# EAGLE board NSL_TI_Robotics_Dev_Board (EAGLE 5.10)
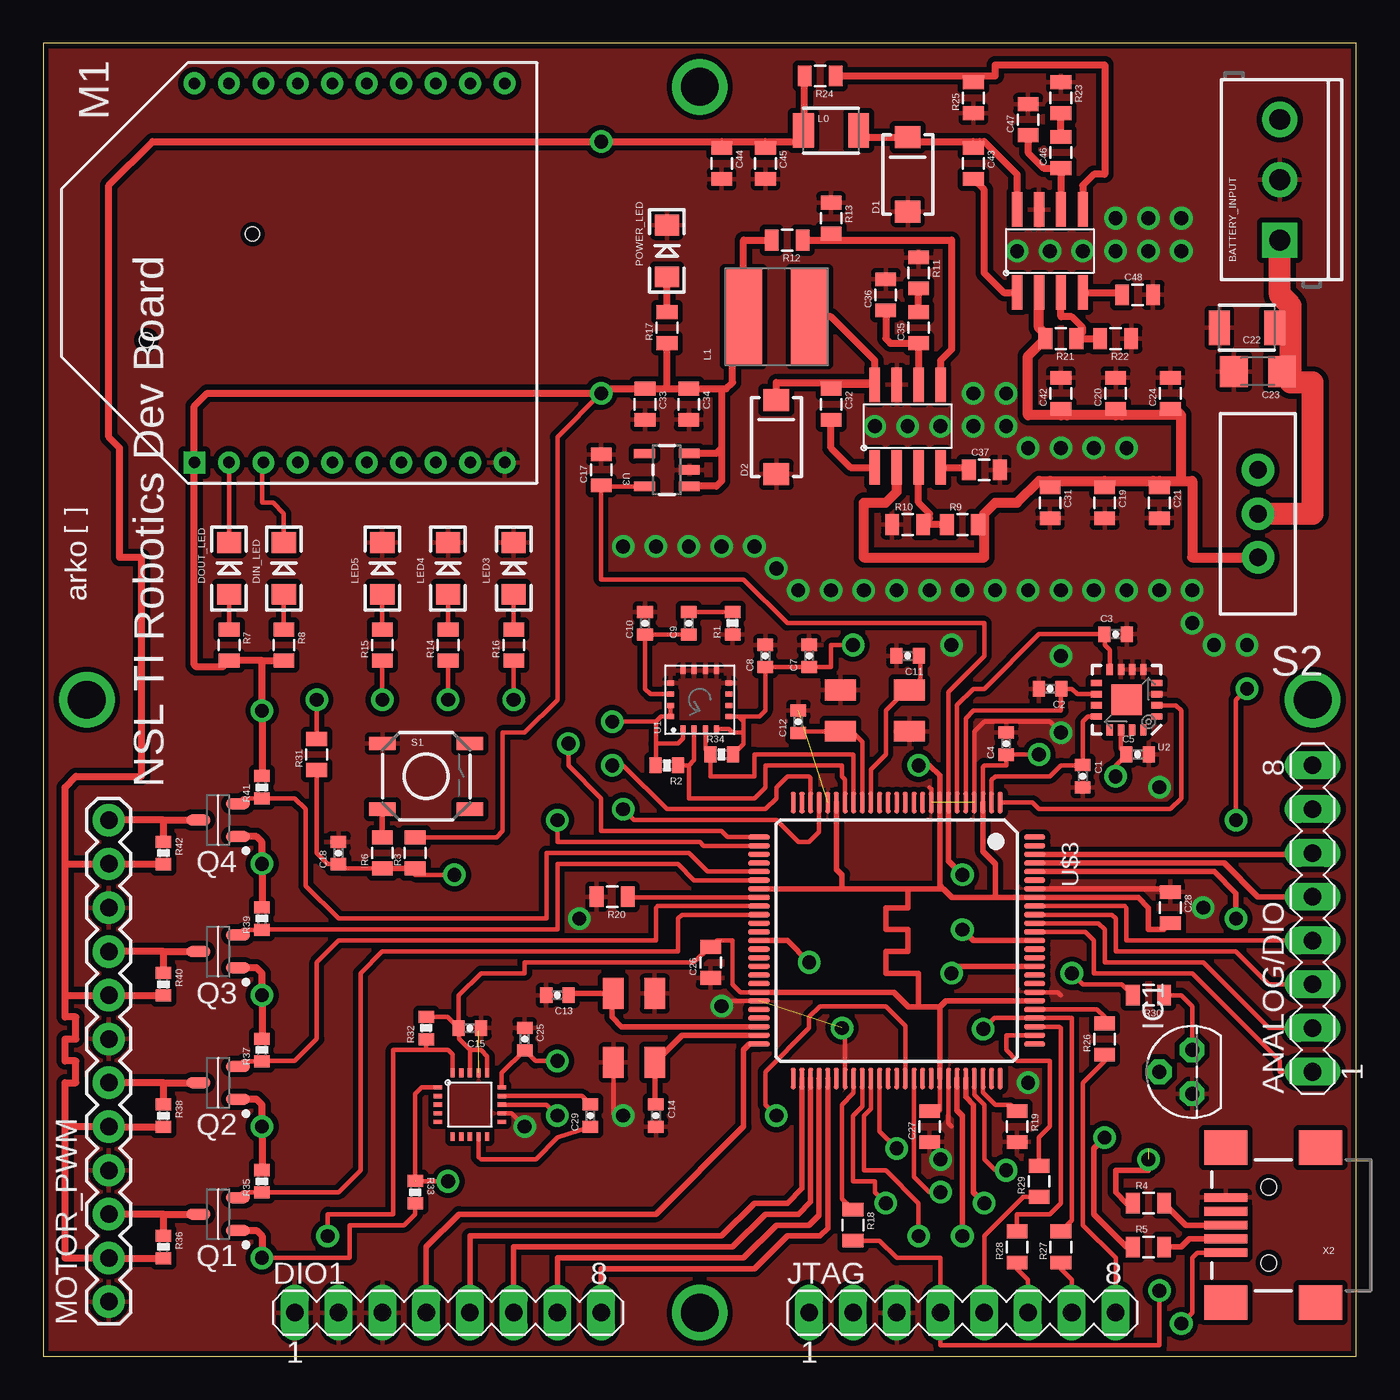
[diagram p0: board, top side]
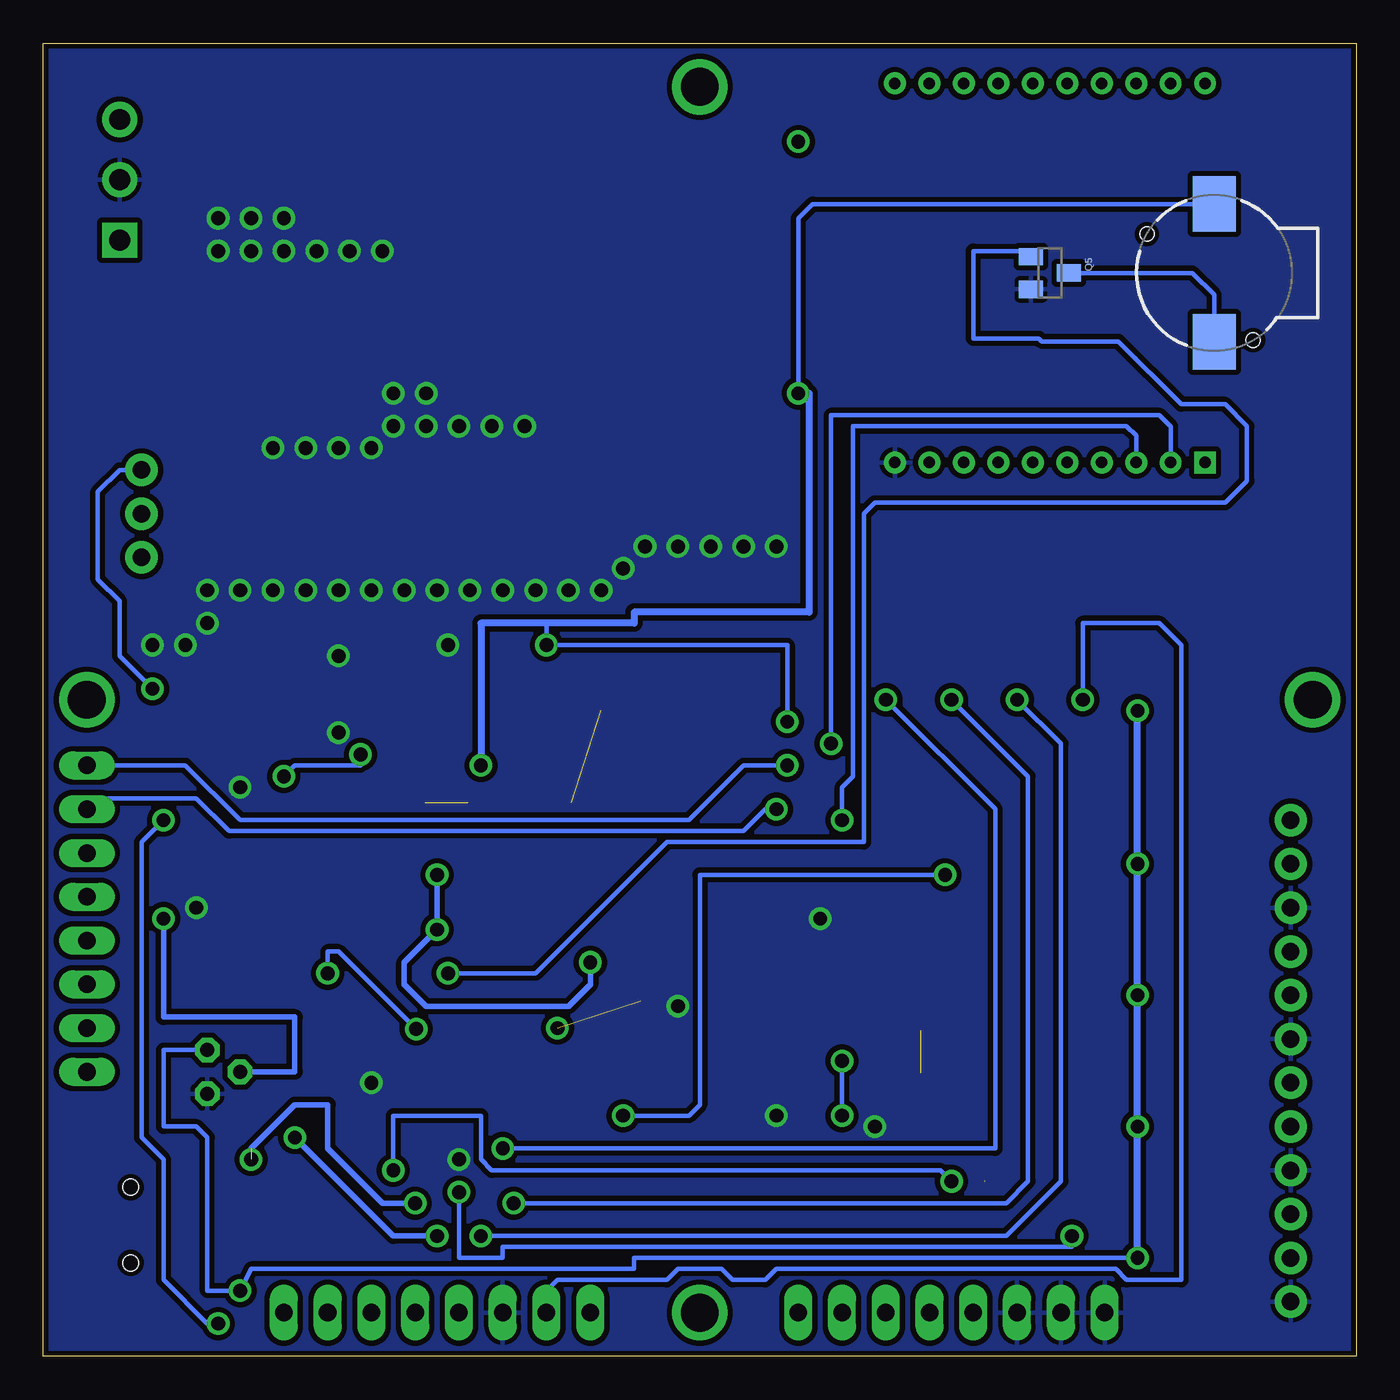
[diagram p1: board, bottom side, seen from below]

Size 76.2 x 76.2 mm. Coordinates in mm from the lower left corner, seen from the top.
Outline: 0,0 76.2,0 76.2,76.2 0,76.2 0,0
Copper layers (1*16): Top 0.0356mm / dielectric 1.5011mm / Bottom 0.0356mm
Design rules "SparkFun-mod": minimum track width 8mil, minimum drill 20mil, track to track 12mil, track to pad 12mil, pad to pad 8mil, via to via 8mil, smd to smd 8mil, copper to edge 12mil, drill to drill 8mil, minimum pad ring 12mil, minimum via ring 10mil, stop-mask expansion 4mil, vias tented up to drill 25mil, thermal gap 10mil
Milling: 4 lines

## Footprints (pad centres in the part's own frame; a part is rotated, then mirrored left to right if it is on the bottom)
ABM3G = smd 1.8 x 1.2: P$1 2,1.2; P$2 -2,1.2; P$3 -2,-1.2; P$4 2,-1.2
MA08-1 = drill 1.016 long: 1 -8.89,0; 2 -6.35,0; 3 -3.81,0; 4 -1.27,0; 5 1.27,0; 6 3.81,0; 7 6.35,0; 8 8.89,0
SCREWTERMINAL-3.5MM-3 = drill 1.2 pad 2.032 square: 1 0,0 | drill 1.2 pad 2.032 round: 2 3.5,0; 3 7,0
0402-CAP = smd 0.7 x 0.9: 1 -0.65,0; 2 0.65,0
0805 = smd 0.8 x 1.2: 1 -0.9,0; 2 0.9,0
1210 = smd 1.2 x 2: 1 -1.6,0; 2 1.6,0
1206 = smd 1.6 x 1.8: 1 -1.4,0; 2 1.4,0
SMA-DIODE = smd 1.27 x 1.47: A -2.15,0; C 2.15,0
LED-1206 = smd 1.2 x 1.4: A -1.5,0; C 1.5,0
TO92 = drill 0.813 octagon: 1 -1.27,0; 2 0,1.905; 3 1.27,0
CR54 = smd 5.5 x 2.15: P$1 0,1.92; P$2 0,-1.92
XBEE = drill 0.66 square: 1 -11,9 | drill 0.66 round: 2 -11,7; 3 -11,5; 4 -11,3; 5 -11,1; 6 -11,-1; 7 -11,-3; 8 -11,-5; 9 -11,-7; 10 -11,-9; 11 11,-9; 12 11,-7; 13 11,-5; 14 11,-3; 15 11,-1; 16 11,1; 17 11,3; 18 11,5; 19 11,7; 20 11,9
1X12 = drill 1.016 pad 1.88 round: 1 0,0; 2 2.54,0; 3 5.08,0; 4 7.62,0; 5 10.16,0; 6 12.7,0; 7 15.24,0; 8 17.78,0; 9 20.32,0; 10 22.86,0; 11 25.4,0; 12 27.94,0
SOT95P280X135-3N = smd 1.4 x 0.65: 1 -1.15,0.95; 2 -1.15,-0.95; 3 1.15,0
SOT23 = smd 1 x 1.4: 1 -0.95,-1.1; 2 0.95,-1.1; 3 0,1.1
0402-RES = smd 0.7 x 0.9: 1 -0.65,0; 2 0.65,0
TACTILE_SWITCH_SMD = smd 1.524 x 0.762: 1 -2.54,1.905; 2 2.54,1.905; 3 -2.54,-1.905; 4 2.54,-1.905
SWITCH-SPDT = drill 1.016 pad 1.88 round: 1 0,2.54; 2 0,0; 3 0,-2.54
BUZZER-CCV = smd 3.2 x 2.5: + 4,0; - -4,0 | hole 0.8: -3.9,-2.25; 2.25,3.9
LGA-16L = smd 0.4 x 0.3: 1 -1.7,0.975; 2 -1.7,0.325; 3 -1.7,-0.325; 4 -1.7,-0.975; 9 1.7,-0.975; 10 1.7,-0.325; 11 1.7,0.325; 12 1.7,0.975 | smd 0.3 x 0.4: 5 -0.975,-1.7; 6 -0.325,-1.7; 7 0.325,-1.7; 8 0.975,-1.7; 13 0.975,1.7; 14 0.325,1.7; 15 -0.325,1.7; 16 -0.975,1.7
LFCSP-16 = smd 1.75 x 1.75: 0 0,0 | smd 0.65 x 0.37: 1 -1.75,0.975; 2 -1.75,0.325; 3 -1.75,-0.325; 4 -1.75,-0.975; 9 1.75,-0.975; 10 1.75,-0.325; 11 1.75,0.325; 12 1.75,0.975 | smd 0.37 x 0.65: 5 -0.975,-1.75; 6 -0.325,-1.75; 7 0.325,-1.75; 8 0.975,-1.75; 13 0.975,1.75; 14 0.325,1.75; 15 -0.325,1.75; 16 -0.975,1.75
SOT23-5 = smd 0.55 x 1.2: 1 -0.95,-1.3; 2 0,-1.3; 3 0.95,-1.3; 4 0.95,1.3; 5 -0.95,1.3
TPS54231 = smd 0.6 x 2: P$1 -1.905,-2.4; P$2 -0.635,-2.4; P$3 0.635,-2.4; P$4 1.905,-2.4; P$5 1.905,2.4; P$6 0.635,2.4; P$7 -0.635,2.4; P$8 -1.905,2.4
LQFP100 = smd 0.3 x 1.25: 1 -6,-8; 2 -5.5,-8; 3 -5,-8; 4 -4.5,-8; 5 -4,-8; 6 -3.5,-8; 7 -3,-8; 8 -2.5,-8; 9 -2,-8; 10 -1.5,-8; 11 -1,-8; 12 -0.5,-8; 13 0,-8; 14 0.5,-8; 15 1,-8; 16 1.5,-8; 17 2,-8; 18 2.5,-8; 19 3,-8; 20 3.5,-8; 21 4,-8; 22 4.5,-8; 23 5,-8; 24 5.5,-8; 25 6,-8; 51 6,8; 52 5.5,8; 53 5,8; 54 4.5,8; 55 4,8; 56 3.5,8; 57 3,8; 58 2.5,8; 59 2,8; 60 1.5,8; 61 1,8; 62 0.5,8; 63 0,8; 64 -0.5,8; 65 -1,8; 66 -1.5,8; 67 -2,8; 68 -2.5,8; 69 -3,8; 70 -3.5,8; 71 -4,8; 72 -4.5,8; 73 -5,8; 74 -5.5,8; 75 -6,8 | smd 1.25 x 0.3: 26 8,-6; 27 8,-5.5; 28 8,-5; 29 8,-4.5; 30 8,-4; 31 8,-3.5; 32 8,-3; 33 8,-2.5; 34 8,-2; 35 8,-1.5; 36 8,-1; 37 8,-0.5; 38 8,0; 39 8,0.5; 40 8,1; 41 8,1.5; 42 8,2; 43 8,2.5; 44 8,3; 45 8,3.5; 46 8,4; 47 8,4.5; 48 8,5; 49 8,5.5; 50 8,6; 76 -8,6; 77 -8,5.5; 78 -8,5; 79 -8,4.5; 80 -8,4; 81 -8,3.5; 82 -8,3; 83 -8,2.5; 84 -8,2; 85 -8,1.5; 86 -8,1; 87 -8,0.5; 88 -8,0; 89 -8,-0.5; 90 -8,-1; 91 -8,-1.5; 92 -8,-2; 93 -8,-2.5; 94 -8,-3; 95 -8,-3.5; 96 -8,-4; 97 -8,-4.5; 98 -8,-5; 99 -8,-5.5; 100 -8,-6
HMC5843 = smd 0.5 x 0.25: P$1 -1.85,1; P$2 -1.85,0.5; P$3 -1.85,0; P$4 -1.85,-0.5; P$5 -1.85,-1; P$11 1.85,-1; P$12 1.85,-0.5; P$13 1.85,0; P$14 1.85,0.5; P$15 1.85,1 | smd 0.25 x 0.5: P$6 -1,-1.85; P$7 -0.5,-1.85; P$8 0,-1.85; P$9 0.5,-1.85; P$10 1,-1.85; P$16 1,1.85; P$17 0.5,1.85; P$18 0,1.85; P$19 -0.5,1.85; P$20 -1,1.85
USB-MINIB = smd 2.5 x 0.5: D+ 2.5,0; D- 2.5,0.8; GND 2.5,-1.6; ID 2.5,-0.8; VBUS 2.5,1.6 | smd 2.5 x 2: GND@1 -3,-4.5; GND@2 -3,4.5; GND@3 2.5,4.5; GND@4 2.5,-4.5 | hole 0.9: 0,2.2; 0,-2.2

## Placement (x,y rotation side)
16MHZ  16MHz  [ABM3G]  34.29,19.05 90 top
25MHZ  25MHz  [ABM3G]  48.26,37.47 0 top
ANALOG/DIO  [MA08-1]  73.66,25.4 90 top
BATTERY_INPUT  [SCREWTERMINAL-3.5MM-3]  71.75,64.77 90 top
C1  0.01uF  [0402-CAP]  60.33,33.66 270 top
C2  0.01uF  [0402-CAP]  58.42,38.73 180 top
C3  0.01uF  [0402-CAP]  62.23,41.91 0 top
C4  0.1uF  [0402-CAP]  55.88,35.56 90 top
C5  1uF  [0402-CAP]  63.5,34.92 0 top
C7  100nF  [0402-CAP]  44.45,40.64 90 top
C8  10uF  [0402-CAP]  41.91,40.64 90 top
C9  470nF  [0402-CAP]  37.47,42.55 90 top
C10  10nF  [0402-CAP]  34.92,42.55 90 top
C11  10pF  [0402-CAP]  50.16,40.64 180 top
C12  10pF  [0402-CAP]  43.81,36.83 90 top
C13  10pF  [0402-CAP]  29.84,20.95 180 top
C14  10pF  [0402-CAP]  35.56,13.97 270 top
C15  0.1uF  [0402-CAP]  24.77,19.05 180 top
C17  1uF  [0805]  32.38,51.44 90 top
C18  0.1uF  [0402-CAP]  17.14,29.21 90 top
C19  4.7uF  [0805]  61.59,49.53 270 top
C20  4.7uF  [0805]  62.23,55.88 90 top
C21  4.7uF  [0805]  64.77,49.53 270 top
C22  10uF  [1210]  69.85,59.69 180 top
C23  1uF  [1206]  70.48,57.15 180 top
C24  4.7uF  [0805]  65.41,55.88 90 top
C25  4.7uF  [0402-CAP]  27.94,18.41 270 top
C26  0.1uF  [0805]  38.73,22.86 90 top
C27  0.1uF  [0805]  51.44,13.34 90 top
C28  0.1uF  [0805]  65.41,26.04 270 top
C29  0.22uF  [0402-CAP]  31.75,13.97 90 top
C31  0.01uF  [0805]  58.42,49.53 270 top
C32  0.1uF  [0805]  45.72,55.24 270 top
C33  47uF  [0805]  34.92,55.24 270 top
C34  47uF  [0805]  37.47,55.24 270 top
C35  1000pF  [0805]  50.8,59.69 90 top
C36  47pF  [0805]  48.9,61.59 90 top
C37  0.015uF  [0805]  54.61,51.44 0 top
C42  0.01uF  [0805]  59.05,55.88 90 top
C43  0.1uF  [0805]  53.98,69.22 270 top
C44  33uF  [0805]  39.37,69.22 270 top
C45  33uF  [0805]  41.91,69.22 270 top
C46  1800pF  [0805]  59.05,69.85 90 top
C47  47pF  [0805]  57.15,71.75 90 top
C48  0.015uF  [0805]  63.5,61.59 0 top
D1  [SMA-DIODE]  50.16,68.58 90 top
D2  [SMA-DIODE]  42.55,53.34 90 top
DIN_LED  [LED-1206]  13.97,45.72 90 top
DIO1  [MA08-1]  23.5,2.54 0 top
DOUT_LED  [LED-1206]  10.79,45.72 90 top
IC1  AD590ZR  [TO92]  66.67,16.51 90 top
JTAG  [MA08-1]  53.34,2.54 0 top
L0  15uH  [1210]  45.72,71.12 0 top
L1  10uH  [CR54]  42.55,60.33 90 top
LED3  [LED-1206]  27.3,45.72 90 top
LED4  [LED-1206]  23.5,45.72 90 top
LED5  [LED-1206]  19.68,45.72 90 top
M1  XBEE  [XBEE]  17.78,62.87 90 top
MOTOR_PWM  [1X12]  3.81,3.17 90 top
POWER_LED  [LED-1206]  36.2,64.14 90 top
Q1  NCH  [SOT95P280X135-3N]  10.16,8.26 180 top
Q2  NCH  [SOT95P280X135-3N]  10.16,15.88 180 top
Q3  NCH  [SOT95P280X135-3N]  10.16,23.5 180 top
Q4  NCH  [SOT95P280X135-3N]  10.16,31.11 180 top
Q5  [SOT23]  17.78,62.87 270 bottom
R1  10K  [0402-RES]  40.01,42.55 90 top
R2  10K  [0402-RES]  36.2,34.29 180 top
R3  10k  [0805]  21.59,29.21 90 top
R4  33  [0805]  64.14,8.89 0 top
R5  33  [0805]  64.14,6.35 0 top
R6  100  [0805]  19.68,29.21 90 top
R7  1K  [0805]  10.79,41.27 270 top
R8  1K  [0805]  13.97,41.27 270 top
R9  DNP  [0805]  53.34,48.26 0 top
R10  DNP  [0805]  50.16,48.26 0 top
R11  29.4K  [0805]  50.8,62.87 270 top
R12  10.2K  [0805]  43.18,64.77 180 top
R13  3.24K  [0805]  45.72,66.04 270 top
R14  1k  [0805]  23.5,41.27 90 top
R15  1k  [0805]  19.68,41.27 90 top
R16  1k  [0805]  27.3,41.27 90 top
R17  1K  [0805]  36.2,59.69 90 top
R18  10K  [0805]  46.99,7.62 270 top
R19  9.10K  [0805]  56.52,13.34 270 top
R20  12.4K  [0805]  33.02,26.67 180 top
R21  DNP  [0805]  59.05,59.05 180 top
R22  DNP  [0805]  62.23,59.05 180 top
R23  21K  [0805]  59.05,73.03 270 top
R24  10K  [0805]  45.09,74.3 180 top
R25  1.91K  [0805]  53.98,73.03 90 top
R26  27  [0805]  61.59,18.41 90 top
R27  27  [0805]  59.05,6.35 90 top
R28  27  [0805]  56.52,6.35 90 top
R29  27  [0805]  57.78,10.16 90 top
R30  10K  [0805]  64.14,20.95 180 top
R31  27  [0805]  15.88,34.92 90 top
R32  10K  [0402-RES]  22.23,19.05 90 top
R33  10K  [0402-RES]  21.59,9.53 270.1 top
R34  10K  [0402-RES]  39.37,34.92 0 top
R35  10K  [0402-RES]  12.7,10.16 90 top
R36  10K  [0402-RES]  6.99,6.35 270 top
R37  10K  [0402-RES]  12.7,17.78 90 top
R38  10K  [0402-RES]  6.99,13.97 270 top
R39  10K  [0402-RES]  12.7,25.4 90 top
R40  10K  [0402-RES]  6.99,21.59 270 top
R41  10K  [0402-RES]  12.7,33.02 90 top
R42  10K  [0402-RES]  6.99,29.21 270 top
S1  SWITCH-MOMENTARY-2SMD  [TACTILE_SWITCH_SMD]  22.23,33.66 0 top
S2  [SWITCH-SPDT]  70.48,48.9 180 top
SG1  BUZZERSMD2  [BUZZER-CCV]  8.26,62.87 90 bottom
U1  L3G4200DH  [LGA-16L]  38.1,38.1 90 top
U2  ADXL335  [LFCSP-16]  62.87,38.1 180 top
U3  SN105125  [SOT23-5]  36.2,51.44 90.1 top
U$1  [ARKO_LOGO]  2.54,43.81 90 top
U$2  TPS54231_3V3  [TPS54231]  50.16,53.98 0 top
U$3  LM3S9B96LM3S9B96  [LQFP100]  49.53,24.13 180 top
U$4  HMC5843  [HMC5843]  24.77,14.61 0 top
U$5  TPS54231_5V  [TPS54231]  58.42,64.14 0 top
X2  USBSMD  [USB-MINIB]  71.12,7.62 180 top

## Library data of the parts
16MHZ 25MHZ = ABM3G
ANALOG/DIO DIO1 JTAG = con-lstb
BATTERY_INPUT C1-C5 C7-C15 C17-C29 C31-C37 C42-C48 D1 D2 DIN_LED DOUT_LED L0 L1 LED3-LED5 MOTOR_PWM POWER_LED Q5 R1-R42 S1 S2 SG1 U2 U3 X2 = SparkFun
IC1 = linear
M1 = xbee_r1
Q1-Q4 = ipc-7351-transistor
U1 = st-microelectronics-l3g4200dh
U$1 = arko_logo
U$2 U$5 = TPS54231
U$3 = luminary-arm
U$4 = HMC5843

## Nets
5V: C44.1 C45.1 L0.1 MOTOR_PWM.2 MOTOR_PWM.5 MOTOR_PWM.8 MOTOR_PWM.11 R24.2 R36.2 R38.2 R40.2 R42.2
ENABLE: R9.1 R10.2 U$2.P$3
ENABLE1: R21.1 R22.2 U$5.P$3
GND: 16MHZ.P$2 16MHZ.P$4 25MHZ.P$2 25MHZ.P$4 BATTERY_INPUT.2 C1.2 C2.2 C3.2 C4.2 C5.2 C7.2 C8.2 C10.2 C11.2 C12.2 C13.2 C14.2 C15.1 C17.2 C18.2 C19.2 C20.2 C21.2 C22.2 C23.2 C24.2 C25.1 C26.1 C27.1 C28.1 C31.2 C33.2 C34.2 C36.2 C37.2 C42.2 C44.2 C45.2 C47.2 C48.2 D1.A D2.A DIO1.1 DIO1.2 DIO1.3 IC1.1 JTAG.3 LED3.C LED4.C LED5.C M1.10 MOTOR_PWM.1 MOTOR_PWM.4 MOTOR_PWM.7 MOTOR_PWM.10 POWER_LED.C Q5.2 R1.1 R10.1 R11.1 R13.1 R19.2 R20.2 R22.1 R23.1 R25.1 S1.1 U1.8 U1.9 U1.10 U1.11 U1.12 U1.13 U2.3 U2.5 U2.6 U2.7 U3.2 U$2.P$7 U$3.4 U$3.9 U$3.21 U$3.45 U$3.57 U$3.69 U$3.82 U$3.94 U$4.P$12 U$4.P$17 U$5.P$7 X2.GND
MOTOR1: MOTOR_PWM.3 Q1.3 R36.1
MOTOR1_LV: Q1.2 R35.1 U$3.35
MOTOR2: MOTOR_PWM.6 Q2.3 R38.1
MOTOR2_LV: Q2.2 R37.1 U$3.34
MOTOR3: MOTOR_PWM.9 Q3.3 R40.1
MOTOR3_LV: Q3.2 R39.1 U$3.31
MOTOR4: MOTOR_PWM.12 Q4.3 R42.1
MOTOR4_LV: Q4.2 R41.1 U$3.30
N$1: C1.1 U2.12 U$3.2
N$2: C2.1 U2.10 U$3.5
N$3: C3.1 U2.8 U$3.6
N$4: U2.2 U$3.1
N$5: LED3.A R16.2
N$6: R4.1 U$3.71
N$7: R4.2 X2.D+
N$8: C17.1 U3.5 U$3.7 U$3.38 U$3.88
N$9: R6.2 S1.3
N$10: R5.2 X2.D-
N$12: JTAG.8 R26.1
N$13: R26.2 U$3.80
N$14: R27.2 R30.2 U$3.79
N$15: R5.1 U$3.70
N$16: DIN_LED.C M1.3 U$3.27
N$17: DOUT_LED.C M1.2 U$3.26
N$18: C9.1 C10.1 U1.14
N$19: C9.2 R1.2
N$20: JTAG.7 R27.1
N$21: R2.1 U1.2 U$3.19
N$22: R34.1 U1.3 U$3.18
N$23: JTAG.6 R28.1
N$24: R28.2 U$3.78
N$25: R29.2 U$3.77
N$26: JTAG.5 R29.1
N$27: LED5.A R15.2
N$28: LED4.A R14.2
N$29: DIN_LED.A R8.1
N$30: DOUT_LED.A R7.1
N$31: ANALOG/DIO.7 U$3.22
N$32: R19.1 U$3.73
N$33: 25MHZ.P$1 C11.1 U$3.16
N$34: R18.1 U$3.58
N$35: R20.1 U$3.33
N$36: Q5.1 U$3.85
N$37: C25.2 U$4.P$13 U$4.P$15
N$38: C29.1 U$4.P$9
N$39: C29.2 U$4.P$14
N$40: 25MHZ.P$3 C12.1 U$3.17
N$41: R33.1 U$3.72 U$4.P$1
N$42: R32.1 U$3.65 U$4.P$20
N$43: ANALOG/DIO.8 U$3.23
N$44: JTAG.2 R31.2
N$47: 16MHZ.P$1 C13.1 U$3.48
N$48: 16MHZ.P$3 C14.1 U$3.49
N$49: DIO1.8 U$3.55
N$50: DIO1.7 U$3.54
N$51: DIO1.6 U$3.53
N$52: DIO1.5 U$3.52
N$53: DIO1.4 U$3.50
N$56: ANALOG/DIO.6 U$3.98
N$57: ANALOG/DIO.5 U$3.97
N$58: ANALOG/DIO.1 U$3.89
N$59: ANALOG/DIO.2 U$3.90
N$60: Q5.3 SG1.-
N$61: R14.1 U$3.59
N$62: C43.2 U$5.P$1
N$63: R15.1 U$3.60
N$64: ANALOG/DIO.3 U$3.91
N$65: C32.2 U$2.P$1
N$66: R16.1 U$3.61
N$67: C32.1 D2.C L1.P$2 U$2.P$8
N$68: POWER_LED.A R17.2
N$69: ANALOG/DIO.4 U$3.92
N$71: IC1.2 U$3.96
N$72: C18.1 R3.1 R6.1 R31.1 U$3.64
N$74: C35.1 C36.1 U$2.P$6
N$75: C37.1 U$2.P$4
N$76: C35.2 R11.2
N$77: C43.1 D1.C L0.2 U$5.P$8
N$78: R12.1 R13.2 U$2.P$5
N$79: C48.1 U$5.P$4
N$80: C46.1 C47.1 U$5.P$6
N$81: C46.2 R23.2
N$82: R24.1 R25.2 U$5.P$5
N$85: BATTERY_INPUT.1 C22.1 C23.1 S2.2
USB_VIN: S2.3 X2.VBUS
VCC: C4.1 C5.1 C7.1 C8.1 C15.2 C26.2 C27.2 C28.2 C33.1 C34.1 IC1.3 JTAG.4 L1.P$1 M1.1 Q1.1 Q2.1 Q3.1 Q4.1 R2.2 R3.2 R7.2 R8.2 R12.2 R17.1 R18.2 R30.1 R32.2 R33.2 R34.2 R35.2 R37.2 R39.2 R41.2 SG1.+ U1.1 U1.4 U1.5 U1.15 U1.16 U2.14 U3.1 U3.3 U$3.3 U$3.8 U$3.20 U$3.32 U$3.44 U$3.68 U$3.81 U$3.93 U$4.P$16 U$4.P$18
VDD: U$3.56
VIN: C19.1 C20.1 C21.1 C24.1 C31.1 C42.1 R9.2 R21.2 S2.1 U$2.P$2 U$5.P$2

## Tracks (layer width: path | path; a pad name or v marks a point on that pad's centre or on a via)
5V  (via drill 0.8)
  Top 0.406: R24.2 44.19,71.19 L0.1 44.12,70.79 43.81,70.48 41.91,70.48 | 39.37,70.48 41.91,70.48 | 39.37,70.48 v32.38,70.48 6.35,70.48 3.81,67.94 3.81,53.34 4.45,52.7 4.45,46.35 5.71,46.35 5.71,33.66 1.91,33.66 1.27,33.02 1.27,28.57 | 39.37,70.48 C44.1 | 41.91,70.48 C45.1 | 1.27,28.57 MOTOR_PWM.11 6.97,28.57 R42.2 | 1.27,20.95 1.27,28.57 | 1.27,20.95 MOTOR_PWM.8 3.83,20.94 R40.2 | 1.27,20.95 1.27,19.68 1.91,19.68 1.91,18.41 1.27,18.41 1.27,17.14 1.91,17.14 1.91,15.88 1.27,15.88 1.27,13.34 | 1.27,13.34 MOTOR_PWM.5 3.83,13.32 R38.2 | 1.27,13.34 1.27,5.71 MOTOR_PWM.2 3.83,5.7 R36.2
ENABLE
  Top 0.406: R9.1 R10.2 51.44,48.63 51.44,48.9 50.8,49.53 U$2.P$3
ENABLE1
  Top 0.406: U$5.P$3 59.05,60.33 59.69,60.33 60.33,59.69 60.33,59.42 R21.1 R22.2
GND  (via drill 0.8)  (4 unrouted)
  Top 0.254: 25.27,18.91 C15.1 | 27.93,19.05 C25.1 | 16MHZ.P$2 33.09,14.04 v33.66,13.97 | v59.05,36.2 58.42,36.83 54.61,36.83 54.03,36.25 U$3.4 | U$4.P$12 27.17,14.11 v27.94,13.34 | U$3.45 39.68,20.63 v39.37,20.32 | U$3.82 58.88,21.13 59.05,20.95 | U$3.9 51.53,32.92 51.44,33.02 | U$3.69 52.53,13.51 52.7,13.34 | U$3.57 46.53,18.88 46.35,19.05
  Top 0.305: U$3.94 65.21,27.13 C28.1
  other vias: 62.23,66.04 64.14,66.04 66.04,66.04 66.04,64.14 64.14,64.14 62.23,64.14 60.33,64.14 58.42,64.14 56.52,64.14 57.15,52.7 59.05,52.7 60.96,52.7 62.87,52.7 55.88,53.98 55.88,55.88 53.98,55.88 53.98,53.98 52.07,53.98 50.16,53.98 48.26,53.98 33.66,46.99 35.56,46.99 37.47,46.99 39.37,46.99 41.27,46.99 42.55,45.72 43.81,44.45 45.72,44.45 47.62,44.45 49.53,44.45 51.44,44.45 53.34,44.45 55.24,44.45 57.15,44.45 59.05,44.45 60.96,44.45 62.87,44.45 64.77,44.45 66.67,44.45 66.67,42.55 67.94,41.27 69.85,41.27 59.05,40.64 64.77,33.02 67.31,26.04 57.15,15.88 31.11,25.4 52.07,11.43 52.7,41.27
  pour Bottom: 0,76.2 76.2,76.2 76.2,0 0,0
  pour Top: 0,76.2 76.2,76.2 76.2,0 0,0
MOTOR1
  Top 0.406: 6.99,8.26 MOTOR_PWM.3 | 6.99,8.26 Q1.3 | R36.1 6.99,8.26
MOTOR1_LV
  Top 0.254: U$3.35 37.06,25.63 36.83,25.4 36.83,23.5 19.68,23.5 18.41,22.23 18.41,10.79 17.14,9.53 12.71,9.53 R35.1 11.62,9.51 Q1.2
MOTOR2
  Top 0.406: 6.99,15.88 MOTOR_PWM.6 | 6.99,15.88 Q2.3 | R38.1 6.99,15.88
MOTOR2_LV
  Top 0.254: U$3.34 35.66,26.13 35.56,26.04 35.56,24.13 17.14,24.13 15.88,22.86 15.88,18.41 14.61,17.14 12.71,17.14 R37.1 11.62,17.13 Q2.2
MOTOR3
  Top 0.406: 6.99,23.5 MOTOR_PWM.9 | 6.99,23.5 Q3.3 | R40.1 6.99,23.5
MOTOR3_LV
  Top 0.254: U$3.31 37.77,27.63 36.83,28.57 29.84,28.57 29.84,24.77 12.71,24.77 R39.1 11.62,24.75 Q3.2
MOTOR4
  Top 0.406: 6.99,31.11 MOTOR_PWM.12 | 6.99,31.11 Q4.3 | R42.1 6.99,31.11
MOTOR4_LV
  Top 0.254: U$3.30 38.55,28.13 37.47,29.21 29.21,29.21 29.21,25.4 17.14,25.4 15.24,27.3 15.24,31.75 14.61,32.38 12.71,32.38 | R41.1 11.62,32.37 Q4.2 | R41.1 12.71,32.38 | 12.71,32.38 12.7,32.38 R41.1
N$1
  Top 0.254: U2.12 60.62,37.12 60.33,36.83 C1.1 60.31,34.29 59.05,34.29 58.42,33.66 55.24,33.66 55.03,33.44 U$3.2
N$2
  Top 0.254: U2.10 60,38.42 59.69,38.73 C2.1 59.05,38.72 59.05,37.47 53.98,37.47 53.53,37.02 U$3.5
N$3
  Top 0.254: U$3.6 53.03,37.79 53.98,38.73 54.61,38.73 57.78,41.91 C3.1 61.59,41.9 61.59,41.27 61.89,40.98 U2.8
N$4
  Top 0.254: U$3.1 57.41,32.13 57.78,31.75 65.41,31.75 66.04,32.38 66.04,37.47 65.73,37.77 U2.2
N$5
  Top 0.254: R16.2 LED3.A
N$6  (via drill 0.8)  (1 unrouted)
  Top 0.305: U$3.71 53.53,15.05 53.98,14.61 53.98,9.53 v54.61,8.89 | R4.1 62.87,8.89 62.23,9.53 62.23,10.79 64.14,10.79 v64.14,11.43
  Bottom 0.305: v54.61,8.89 56.52,8.89 59.69,12.06 59.69,14.61 61.59,14.61 64.14,12.06
N$7
  Top 0.305: X2.D+ 66.31,7.62 R4.2
N$8  (via drill 0.8)
  Top 0.254: U$3.7 52.53,38.56 54.61,40.64 54.61,42.55 43.18,42.55 40.64,45.09 32.38,45.09 32.38,50.8 32.7,50.48 U3.5 32.44,50.48 C17.1
  Top 0.305: U$3.7 52.53,28.75 v53.34,27.94 | U$3.88 53.98,24.13 v53.34,24.77 | U$3.38 43.18,24.13 v44.45,22.86
  Bottom 0.305: v53.34,27.94 v53.34,24.77 55.24,22.86 55.24,21.59 53.98,20.32 45.72,20.32 44.45,21.59 v44.45,22.86
N$9
  Top 0.305: R6.2 S1.3
N$10
  Top 0.305: X2.D- 66.51,6.82 66.04,6.35 R5.2
N$11  (via drill 0.8)
  other vias: 46.35,19.05
N$12
  Top 0.254: R26.1 61.59,17.14 60.33,15.88 60.33,7.62 62.23,5.71 JTAG.8
N$13
  Top 0.254: U$3.80 61.15,20.13 61.59,19.68 R26.2
N$14  (via drill 0.8)
  Top 0.254: R27.2 59.69,7.88 59.69,19.63 U$3.79 55.19,19.63 v54.55,19 | v59.69,22.23 60.33,21.59 62.6,21.59 R30.2
  Bottom 0.254: 54.61,19.05 v54.55,19 59.05,23.5 59.69,23.5 v59.69,22.23
N$15  (via drill 0.8)
  Top 0.305: U$3.70 53.03,14.28 53.34,13.97 v53.34,6.99 | R5.1 62.87,6.35 60.96,8.26 60.96,12.06 v61.59,12.7
  Bottom 0.305: v53.34,6.99 55.88,6.99 v61.59,12.7
N$16  (via drill 0.8)
  Top 0.254: U$3.27 38.31,29.63 38.1,29.84 29.84,29.84 v29.84,31.11 | DIN_LED.C 13.97,48.9 13.34,49.53 12.7,49.53 12.7,51.78 M1.3
  Bottom 0.254: M1.3 12.78,53.42 13.34,53.98 29.21,53.98 29.21,33.66 29.84,33.02 v29.84,31.11
N$17  (via drill 0.8)
  Top 0.254: U$3.26 39.72,30.13 39.37,30.48 32.38,30.48 32.38,32.38 30.48,34.29 v30.48,35.56 | DOUT_LED.C 10.79,51.85 M1.2
  Bottom 0.254: M1.2 10.78,53.96 11.43,54.61 30.48,54.61 v30.48,35.56
N$18
  Top 0.254: U1.14 35.23,38.42 34.92,38.73 C10.1 C9.1
N$19
  Top 0.254: C9.2 R1.2
N$20
  Top 0.254: R27.1 59.05,5.08 59.69,4.45 JTAG.7
N$21
  Top 0.254: U1.2 37.77,34.6 37.47,34.29 | 37.47,34.29 R2.1 | U$3.19 46.53,33.48 46.35,33.66 46.35,34.29 41.91,34.29 41.91,33.02 41.27,32.38 37.47,32.38 37.47,34.29
N$22
  Top 0.254: U$3.18 47.03,34.88 46.99,34.92 41.27,34.92 41.27,33.66 38.73,33.66 38.73,34.92 R34.1 38.42,35.22 U1.3
N$23
  Top 0.254: R28.1 56.52,5.08 57.15,4.45 JTAG.6
N$24
  Top 0.254: U$3.78 58.98,19.13 59.05,19.05 59.05,8.89 58.42,8.26 56.52,8.26 R28.2
N$25
  Top 0.254: U$3.77 55.88,18.63 55.88,17.78 56.52,17.14 58.42,17.14 58.42,13.34 57.78,12.7 R29.2
N$26
  Top 0.254: R29.1 56.88,9.26 54.61,6.99 JTAG.5
N$27
  Top 0.254: R15.2 LED5.A
N$28
  Top 0.254: R14.2 LED4.A
N$29
  Top 0.254: R8.1 DIN_LED.A
N$30
  Top 0.254: R7.1 DOUT_LED.A
N$31  (via drill 0.8)
  Top 0.254: U$3.22 45.03,30.43 44.45,29.84 43.81,29.84 42.55,31.11 34.29,31.11 v33.66,31.75
  Bottom 0.254: v33.66,31.75 34.29,31.75 35.56,30.48 65.41,30.48 67.31,32.38 73.03,32.38 ANALOG/DIO.7
N$32
  Top 0.254: U$3.73 54.53,15.32 55.24,14.61 56.15,14.61 R19.1
N$33
  Top 0.254: U$3.16 48.03,34.06 48.9,34.92 48.9,37.47 50.09,38.66 25MHZ.P$1 50.9,39.3 50.9,40.56 C11.1
N$34
  Top 0.254: U$3.58 47.03,15.28 46.35,14.61 46.35,9.15 R18.1
N$35
  Top 0.254: U$3.33 33.96,26.63 R20.1
N$36  (via drill 0.8)
  Top 0.305: U$3.85 53.11,22.63 v52.7,22.23
  Bottom 0.254: v52.7,22.23 47.62,22.23 40.01,29.84 28.57,29.84 28.57,48.9 27.94,49.53 7.62,49.53 6.35,50.8 6.35,53.98 7.62,55.24 10.16,55.24 13.8,58.88 18.25,58.88 18.41,59.05 22.23,59.05 22.23,64.14 18.88,64.14 Q5.1
N$37  (via drill 0.8)
  Top 0.254: U$4.P$15 26.61,16.44 C25.2 28.56,17.14 v29.84,17.14 | U$4.P$13 29.21,14.61 v29.84,13.97
  Bottom 0.254: v29.84,13.97 v29.84,17.14
N$38
  Top 0.254: U$4.P$9 25.27,11.56 25.4,11.43 28.59,11.43 28.59,11.45 29.84,12.7 C29.1
N$39
  Top 0.254: U$4.P$14 31.27,15.11 C29.2
N$40
  Top 0.254: U$3.17 47.53,35.66 46.99,36.2 46.33,36.2 25MHZ.P$3 43.9,36.27 C12.1
N$41  (via drill 0.8)  (1 unrouted)
  Top 0.254: U$3.72 54.03,15.19 54.61,14.61 54.61,11.43 55.24,10.79 v55.88,10.79 | v23.5,10.16 R33.1 21.59,15.24 21.95,15.61 U$4.P$1
  Bottom 0.254: v23.5,10.16 24.13,10.79 50.16,10.79 50.8,11.43 50.8,13.97 55.88,13.97 v55.88,10.79
N$42  (via drill 0.8)
  Top 0.254: U$4.P$20 23.77,17.51 23.5,17.78 22.23,17.78 | 22.23,17.78 20.32,17.78 20.32,8.26 16.51,8.26 v16.51,6.99 16.52,6.97 | v52.07,9.53 51.44,9.53 50.53,10.43 U$3.65 | 22.23,17.78 R32.1
  Bottom 0.254: v52.07,9.53 52.07,5.71 49.53,5.71 49.53,6.35 16.51,6.35 v16.51,6.99
N$43  (via drill 0.8)
  Top 0.254: U$3.23 44.53,33.58 44.45,33.66 43.18,33.66 42.55,33.02 42.55,32.38 41.91,31.75 36.2,31.75 33.66,34.29 v33.02,34.29
  Bottom 0.254: v33.02,34.29 35.56,34.29 38.73,31.11 64.77,31.11 67.94,34.29 ANALOG/DIO.8
N$44  (via drill 0.8)
  Top 0.254: v15.88,38.1 R31.2
  Bottom 0.254: JTAG.2 46.99,3.81 46.35,4.45 40.01,4.45 39.37,5.08 36.83,5.08 36.2,4.45 34.29,4.45 33.66,5.08 13.97,5.08 13.34,4.45 10.16,4.45 10.16,41.27 11.43,42.55 15.88,42.55 v15.88,38.1
N$45  (via drill 2.2)
  other vias: 38.1,2.54
N$46  (via drill 2.2)
  other vias: 73.66,38.1
N$47
  Top 0.305: U$3.48 33.58,19.13 33.02,19.68 33.02,20.98 16MHZ.P$1 30.59,21.05 C13.1
N$48
  Top 0.305: U$3.49 37.07,18.63 16MHZ.P$3 35.49,14.69 C14.1
N$49
  Top 0.305: U$3.55 45.53,7.43 45.09,6.99 43.18,6.99 41.27,5.08 32.38,5.08 DIO1.8
N$50
  Top 0.305: U$3.54 45.03,8.2 44.45,7.62 42.55,7.62 40.64,5.71 29.84,5.71 DIO1.7
N$51
  Top 0.305: U$3.53 44.53,8.97 43.81,8.26 41.91,8.26 40.01,6.35 27.3,6.35 DIO1.6
N$52
  Top 0.305: U$3.52 44.03,9.74 43.18,8.89 41.27,8.89 39.37,6.99 24.77,6.99 DIO1.5
N$53
  Top 0.305: U$3.50 40.99,18.13 40.64,17.78 40.64,13.34 35.56,8.26 24.13,8.26 22.23,6.35 DIO1.4
N$54  (via drill 2.2)
  other vias: 2.54,38.1
N$55  (via drill 2.2)
  other vias: 38.1,73.66
N$56
  Top 0.305: U$3.98 73.58,29.13 ANALOG/DIO.6
N$57
  Top 0.305: U$3.97 68.53,28.63 70.48,26.67 ANALOG/DIO.5
N$58
  Top 0.254: ANALOG/DIO.1 71.75,16.51 71.75,17.14 66.67,22.23 60.96,22.23 60.96,24.13 60.46,24.63 U$3.89
N$59
  Top 0.254: U$3.90 61.23,25.13 61.59,24.77 61.59,22.86 67.31,22.86 71.12,19.05 ANALOG/DIO.2
N$60
  Bottom 0.254: Q5.3 9.53,62.87 8.26,61.59 SG1.-
N$61  (via drill 0.8)
  Top 0.254: U$3.59 47.53,14.51 46.99,13.97 46.99,10.16 48.26,10.16 48.26,9.53 v48.9,8.89 | v23.5,38.1 R14.1
  Bottom 0.254: v48.9,8.89 20.32,8.89 19.05,10.16 19.05,33.66 v23.5,38.1
N$62
  Top 0.406: U$5.P$1 55.74,61.73 54.61,62.87 54.61,67.68 C43.2
N$63  (via drill 0.8)
  Top 0.254: U$3.60 48.03,14.38 47.62,13.97 47.62,10.79 48.9,10.79 50.8,8.89 v50.8,6.99 | v19.68,38.1 R15.1
  Bottom 0.254: v50.8,6.99 20.32,6.99 17.14,10.16 17.14,35.56 v19.68,38.1
N$64
  Top 0.254: U$3.91 62,25.63 62.23,25.4 62.23,23.5 69.22,23.5 71.12,21.59 ANALOG/DIO.3
N$65
  Top 0.406: U$2.P$1 46.85,51.58 45.72,52.7 C32.2
N$66  (via drill 0.8)
  Top 0.254: v27.3,38.1 R16.1 | U$3.61 48.53,13.06 v49.53,12.06
  Bottom 0.254: v27.3,38.1 20.95,31.75 20.95,12.06 v49.53,12.06
N$67
  Top 0.406: U$2.P$8 48.26,57.78 45.72,60.33 L1.P$2 | U$2.P$8 45.95,56.38 C32.1 | D2.C 42.55,56.52 48.12,56.52 U$2.P$8
N$68
  Top 0.406: R17.2 POWER_LED.A
N$69
  Top 0.254: U$3.92 62.77,26.13 62.87,26.04 62.87,24.13 ANALOG/DIO.4
N$71  (via drill 0.8)
  Top 0.305: U$3.96 67.94,28.13 69.22,26.86 v69.22,25.4
  Bottom 0.305: v69.22,25.4 69.22,19.68 61.59,19.68 61.59,16.51 IC1.2
N$72  (via drill 0.8)
  Top 0.254: v42.55,13.97 41.91,14.61 41.91,16.51 44.45,19.05 44.45,19.68 45.09,20.32 48.9,20.32 50.03,19.18 U$3.64 | v23.86,27.94 21.59,27.94 R3.1 | R6.1 17.39,28.31 C18.1 17.13,28.57 16.51,28.57 15.88,29.21 R31.1
  Top 0.305: R6.1 R3.1
  Bottom 0.254: v42.55,13.97 38.73,13.97 38.1,14.61 38.1,27.94 v23.86,27.94
N$74
  Top 0.406: U$2.P$6 C35.1 49.16,58.79 48.9,59.05 C36.1
N$75
  Top 0.406: U$2.P$4 53.57,51.58 C37.1
N$76
  Top 0.406: C35.2 R11.2
N$77
  Top 0.406: U$5.P$8 56.52,68.58 54.61,70.48 54.34,70.48 | 54.34,70.48 C43.1 53.98,70.48 | 53.98,70.48 54.34,70.48 | 53.98,70.48 50.41,70.48 D1.C 47.71,70.73 L0.2
N$78
  Top 0.406: U$2.P$5 52.07,57.78 52.7,58.42 52.7,64.77 R12.1 45.35,64.77 R13.2
N$79
  Top 0.406: U$5.P$4 62.46,61.73 C48.1
N$80
  Top 0.406: U$5.P$6 C46.1 58.05,68.95 57.15,69.85 C47.1
N$81
  Top 0.406: C46.2 R23.2
N$82
  Top 0.406: R24.1 53.98,74.3 | 53.98,74.3 55.24,74.3 55.24,74.93 61.59,74.93 61.59,68.58 60.96,68.58 60.33,67.94 U$5.P$5 | 53.98,74.3 R25.2
N$85
  Top 1.016: 72.39,59.69 C22.1
  Top 1.27: BATTERY_INPUT.1 71.75,61.59 72.39,60.96 72.39,59.69 72.39,56.65 | S2.2 73.66,48.9 73.66,56.52 72.39,56.52 72.39,56.65 | 72.39,56.65 C23.1
USB_VIN  (via drill 0.8)
  Top 0.254: X2.VBUS 66.98,6.02 66.67,5.71 66.67,2.54 v66.04,1.91 | v69.85,38.73 69.22,38.1 v69.22,31.11
  Bottom 0.254: S2.3 71.75,51.44 73.03,50.16 73.03,45.09 71.75,43.81 71.75,40.64 v69.85,38.73 | v66.04,1.91 66.67,1.91 69.22,4.45 69.22,11.43 70.48,12.7 70.48,29.84 v69.22,31.11
VCC  (via drill 0.8)
  Top 0.254: U1.15 U1.16 35.85,37.12 35.56,36.83 | U1.1 37.12,35.85 36.83,35.56 35.56,35.56 | 35.56,35.56 35.56,34.3 R2.2 | v33.02,36.83 35.56,36.83 | 35.56,36.83 35.56,35.56 | C8.1 C7.1 44.47,40.01 45.72,40.01 45.72,41.27 v46.99,41.27 | C8.1 41.92,39.99 | U1.5 40.34,37.12 40.64,36.83 | 40.64,36.83 40.64,36.2 | 40.64,36.2 40.64,35.55 R34.2 | 24.77,17.78 U$4.P$18 | 24.77,17.78 24.13,18.41 24.13,19.04 C15.2 | U$3.44 40.47,21.13 40.01,21.59 40.01,24.13 39.1,24.13 C26.2 37.73,22.86 27.94,22.86 27.94,22.23 25.4,22.23 24.11,20.94 C15.2 | R18.2 48.52,6.72 49.53,5.71 52.07,5.71 JTAG.4 52.07,0.64 64.77,0.64 v64.77,3.81 | U1.5 41.57,37.12 41.91,37.47 C8.1 | U$4.P$16 25.77,17.41 25.4,17.78 24.77,17.78 | v32.38,55.88 29.84,53.34 29.84,38.1 27.94,36.2 26.67,36.2 26.67,30.48 26.3,30.11 R3.2 | U$3.3 54.53,34.21 54.61,34.29 55.88,34.29 C4.1 55.88,34.92 v57.78,34.92 | 62.54,35.23 U2.14 | 62.54,35.23 C5.1 | 62.54,35.23 62.55,35.23 62.87,34.92 62.23,34.29 v62.23,33.66 | U$3.68 52.03,14.28 C27.2 | R30.1 66.04,20.95 66.67,20.32 IC1.3 | U1.5 40.64,37.12 40.64,36.83 | U1.4 39.8,36.4 40.01,36.2 40.64,36.2 | R33.2 21.59,8.26 20.95,7.62 17.78,7.62 17.78,5.71 v12.7,5.71 | R32.2 23.46,19.7 C15.2
  Top 0.305: C28.2 65.03,24.77 64.14,24.77 64.14,26.04 63.54,26.63 U$3.93 55.24,26.63 | 55.24,26.63 52.74,26.63 52.24,27.13 | 52.24,27.13 52.03,27.34 U$3.8 52.03,33.7 51.44,34.29 v50.8,34.29 | 46.35,27.13 U$3.32 | 50.16,27.13 46.35,27.13 | 52.24,27.13 50.16,27.13 | U$3.20 46.03,28.27 46.35,27.94 46.35,27.13 | U$3.44 49.35,21.13 50.2,20.28 50.8,20.28 | U$3.81 52.38,20.63 52.03,20.28 | 52.03,20.28 U$3.68 | 50.8,20.28 52.03,20.28 | 50.16,27.13 50.16,26.04 48.9,26.04 48.9,24.77 50.16,24.77 50.16,23.5 48.9,23.5 48.9,22.23 50.8,22.23 50.8,20.28 | U$3.3 54.53,29.29 55.24,28.57 55.24,26.63
  Top 0.406: R12.2 40.64,64.77 40.64,60.34 L1.P$1 40.01,59.7 40.01,56.52 39.63,56.15 39.37,56.15 | 36.2,56.15 C33.1 32.65,56.15 v32.38,55.88 9.53,55.88 8.78,55.13 M1.1 8.78,40.12 8.89,40.01 10.43,40.01 R7.2 12.7,40.38 | 36.2,56.15 C34.1 39.37,56.15 | 12.7,40.38 R8.2 | R41.2 v12.7,37.47 12.7,40.38 | Q4.1 12.38,30.16 12.7,29.84 v12.7,28.57 R39.2 | R37.2 v12.7,20.95 12.7,22.23 12.38,22.55 Q3.1 | Q2.1 12.38,14.93 12.7,14.61 v12.7,13.34 R35.2 | Q1.1 12.38,7.3 12.7,6.99 v12.7,5.71 | 36.2,56.15 R17.1 | U3.1 39.06,50.49 39.37,50.8 39.37,52.7 | U3.3 39.05,52.39 39.37,52.7 | 39.37,56.15 39.37,52.7
  Bottom 0.254: v33.02,36.83 33.02,41.27 v46.99,41.27 46.99,42.55 | v12.7,5.71 41.91,5.71 41.91,5.08 64.14,5.08 v64.77,3.81 66.67,3.81 66.67,12.7 67.31,13.34 69.22,13.34 69.22,17.78 IC1.3 | SG1.+ 31.56,66.86 32.38,66.04 v32.38,55.88 | v57.78,34.92 57.78,34.29 61.59,34.29 v62.23,33.66
  Bottom 0.406: v12.7,37.47 v12.7,28.57 v12.7,20.95 v12.7,13.34 v12.7,5.71 | v32.38,55.88 31.75,55.88 31.75,43.18 41.91,43.18 41.91,42.55 46.99,42.55 50.8,42.55 v50.8,34.29
VIN
  Top 0.584: U$2.P$2 49.53,50.16 48.9,49.53 47.62,49.53 47.62,46.35 54.61,46.35 54.61,47.89 | 54.61,47.89 R9.2 54.61,48.26 | 54.61,47.89 54.61,48.26 | 54.61,48.26 54.61,48.9 55.24,49.53 56.52,49.53 57.78,50.8 58.42,50.8 | 58.42,50.8 61.59,50.8 | 61.59,50.8 64.4,50.8 | 64.4,50.8 C21.1 64.77,50.8 | 58.42,50.8 C31.1 | 61.59,50.8 C19.1 | 64.4,50.8 64.77,50.8 | 64.77,50.8 66.04,50.8 | 66.04,50.8 66.67,50.8 66.67,46.35 S2.1 | 66.04,50.8 66.04,54.61 | C24.1 65.67,54.98 66.04,54.61 | 66.04,54.61 62.6,54.61 | 62.6,54.61 C20.1 62.23,54.61 | 62.6,54.61 62.23,54.61 | 62.23,54.61 59.42,54.61 | 59.42,54.61 C42.1 59.05,54.61 | 59.42,54.61 59.05,54.61 | 59.05,54.61 57.15,54.61 57.15,58.05 R21.2 58.16,59.32 57.78,59.69 U$5.P$2

## Text on the board
tNames: NSL TI Robotics Dev Board